# Altium PCB TeamC&K_PCB.PcbDoc (part 1 of 2)
Units mil, origin at the board's own origin, x right, y up, seen from the top; angles counter-clockwise.
Board outline 3149.61 x 2362.21 mil, 4 copper layers (Top Layer, GND, VCC, Bottom Layer), stack 30.835 mil thick; 107 components, 60 nets, 325 pads, 86 vias.
Unrouted connection lines stored in the file: 14.
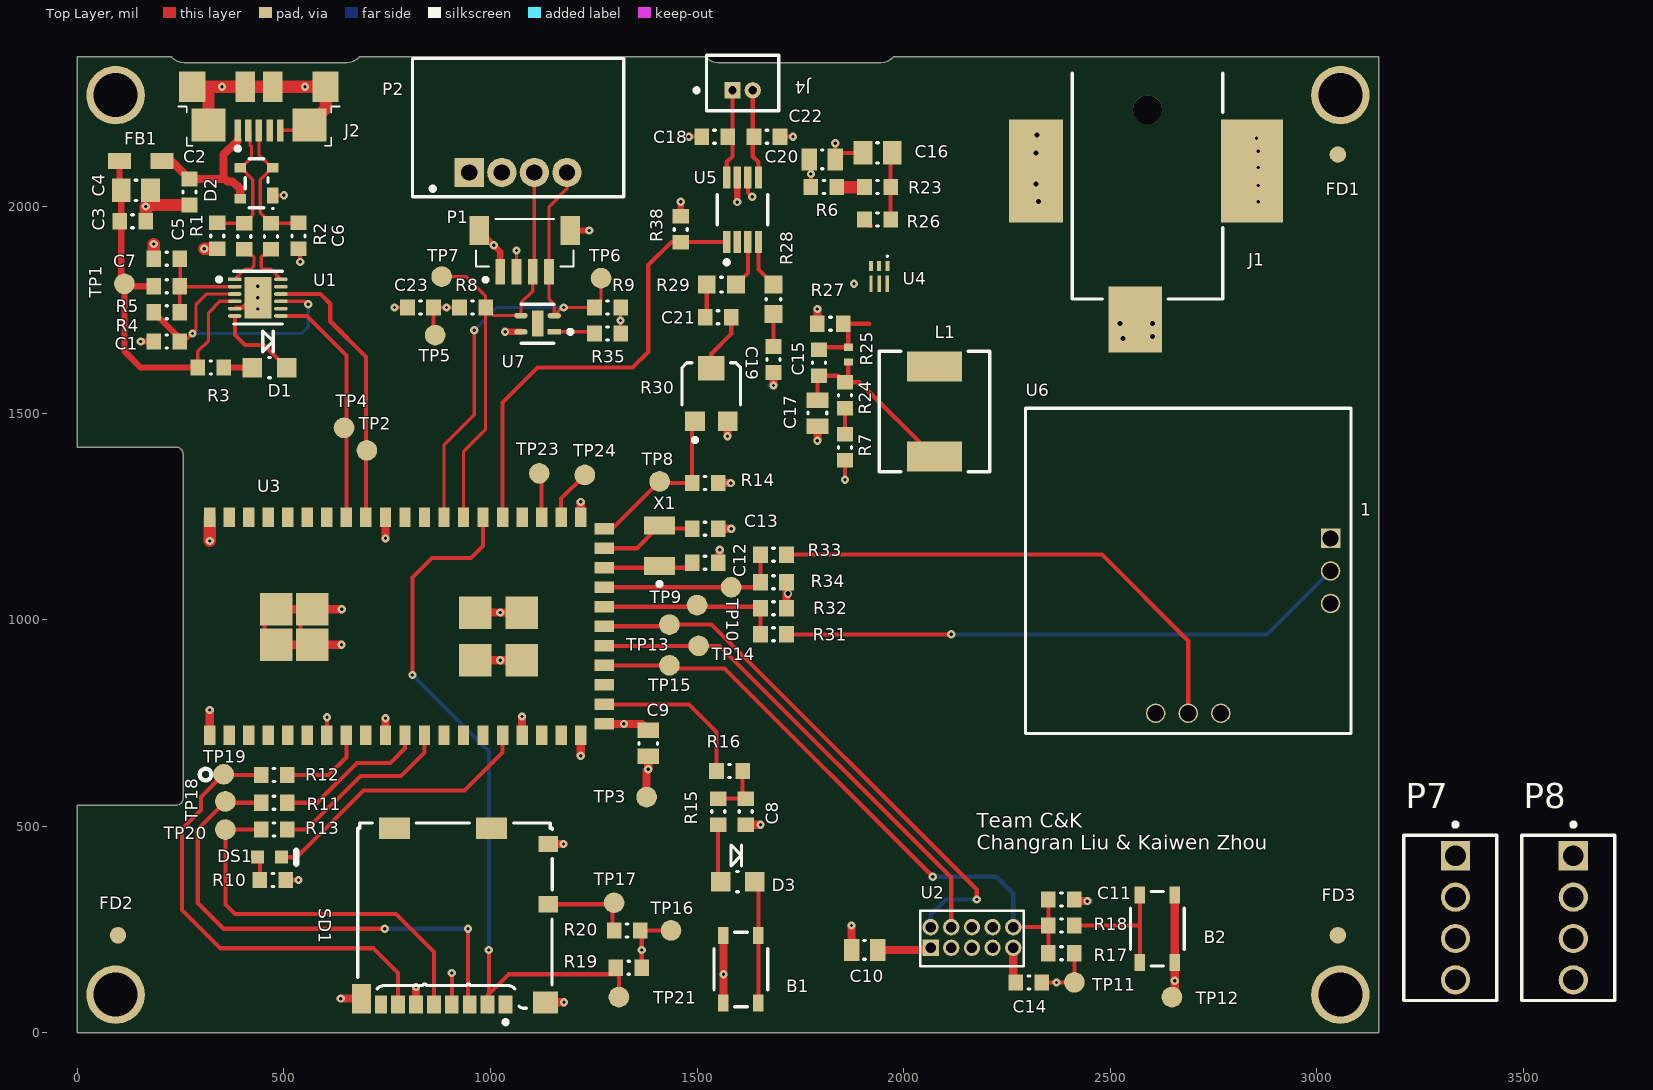
[diagram p0: Top Layer view]
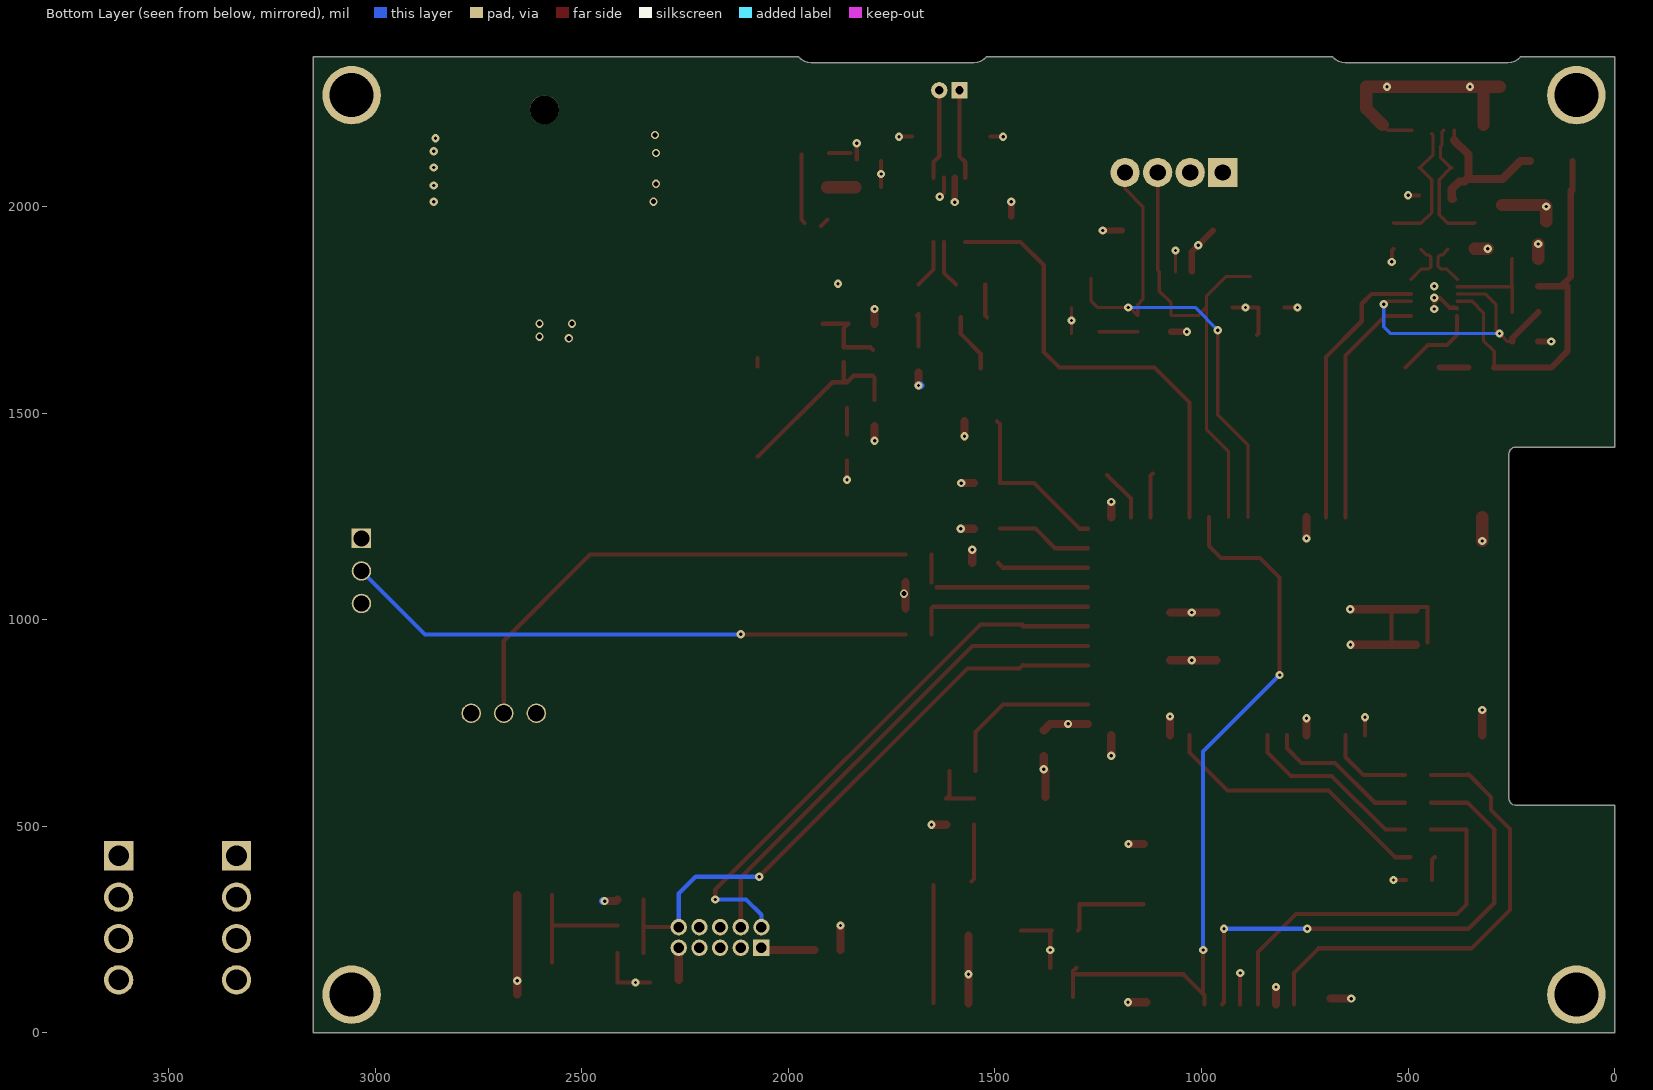
[diagram p1: Bottom Layer view, seen from below]
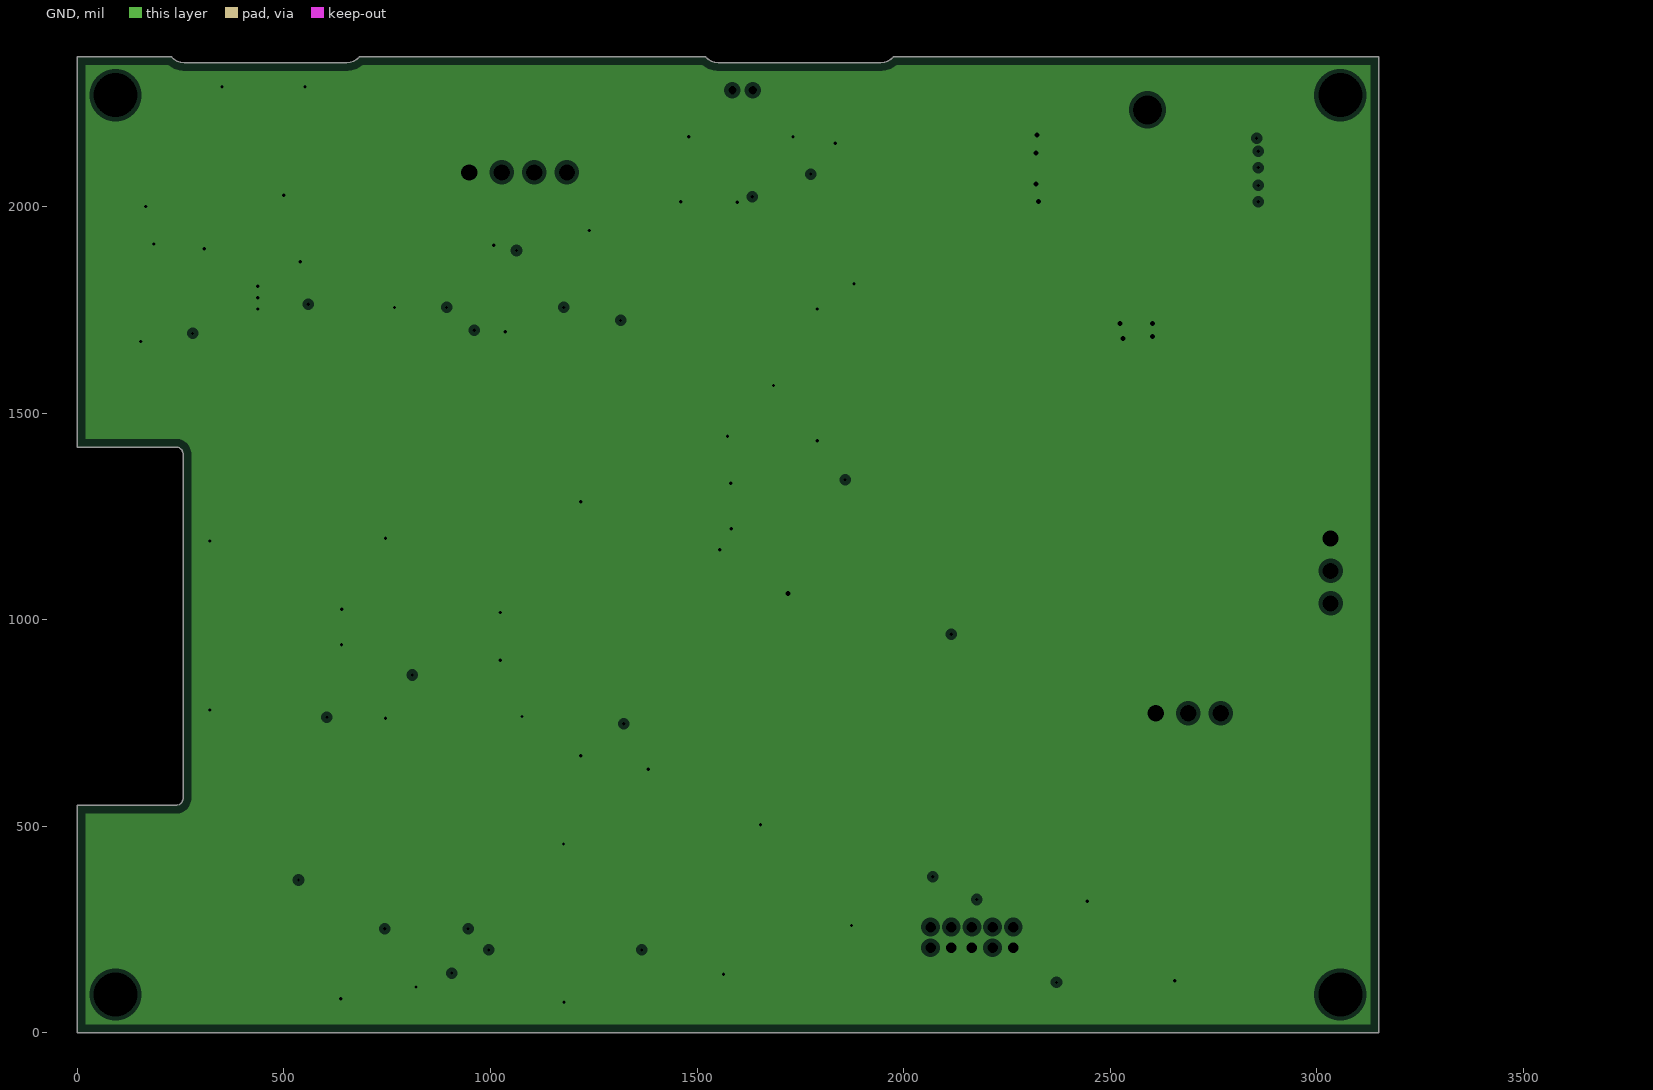
[diagram p2: GND, clearances drawn from the general rule]
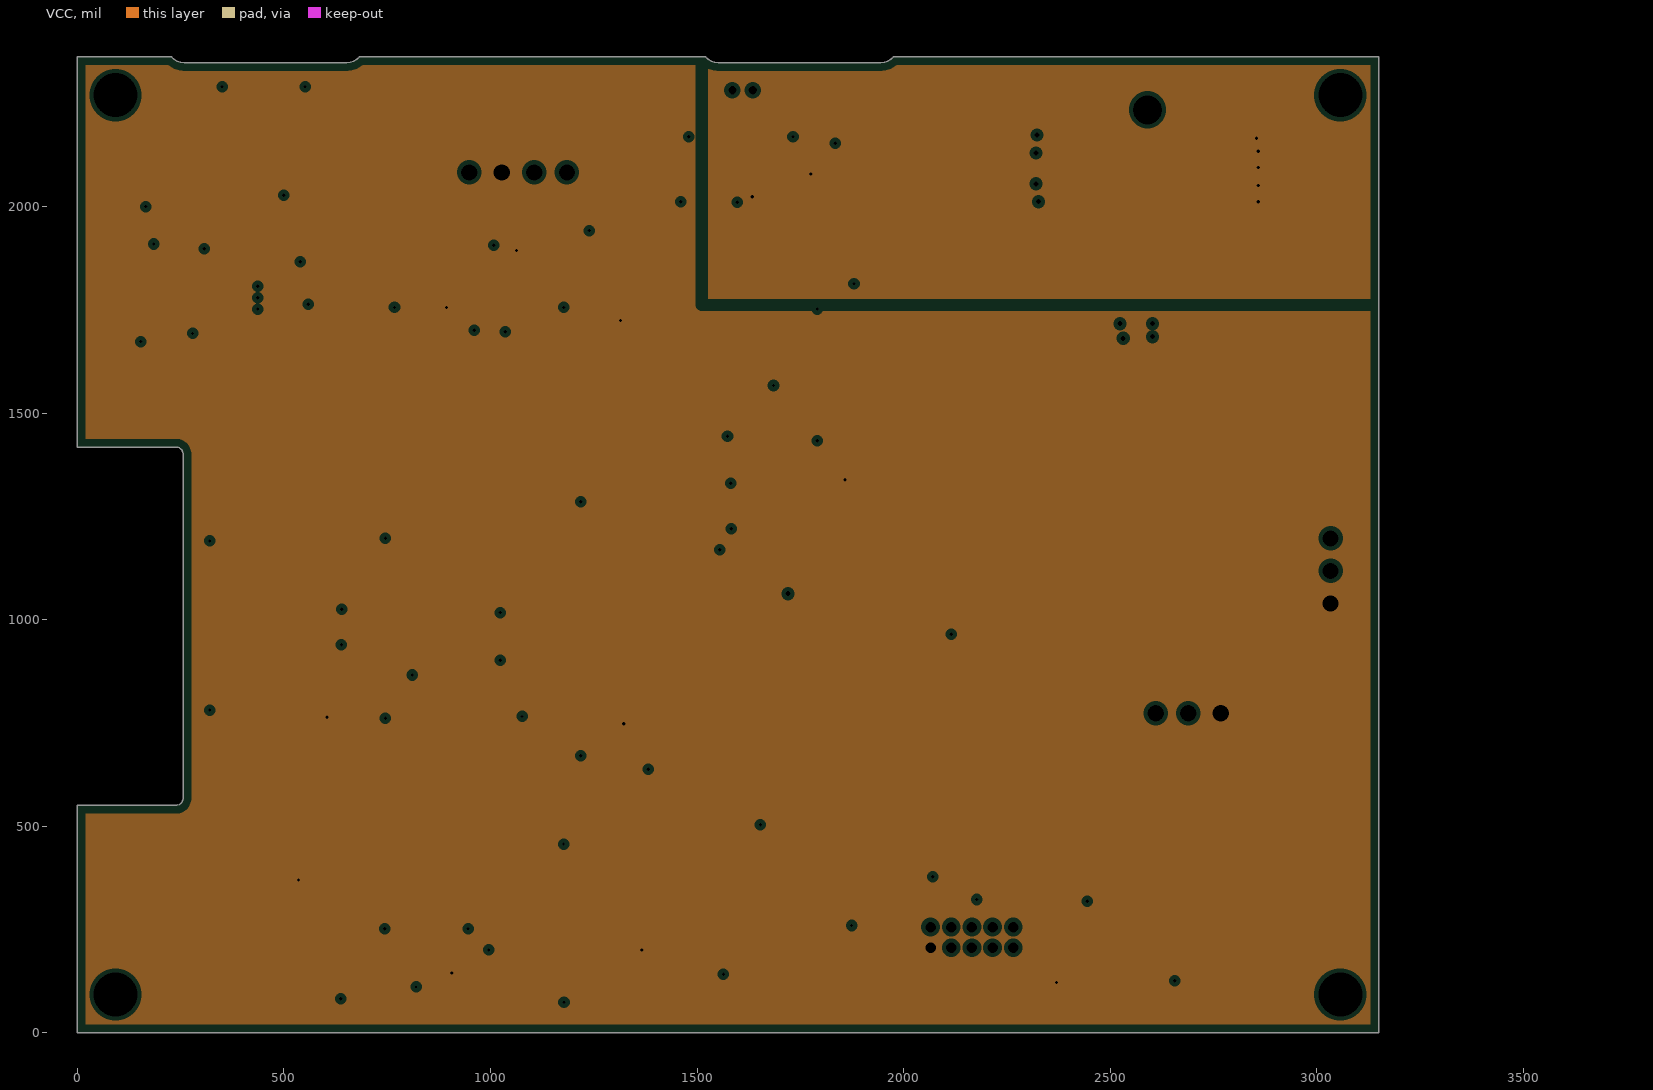
[diagram p3: VCC, clearances drawn from the general rule]

## Layer stack, top to bottom
Top Solder: solder mask 1, Solder Resist, Dk 3.5
Top Layer: signal copper 1.5
Dielectric1: core 10, PP-006, Dk 4.2
GND: plane copper 1.4173, net GND
Dielectric 3: prepreg 5, Dk 4.2
VCC: plane copper 1.4173, net (Multiple Nets)
Dielectric 2: core 10, Dk 4.2
Bottom Layer: signal copper 1.5
Bottom Solder: solder mask 1, Solder Resist, Dk 3.5

## Board outline
240.16,551.18 0,551.18 0,0 3149.61,0 3149.61,2362.21 1975.39,2362.2 1969.06,2356.37 1961.63,2352.01 1953.45,2349.32 1944.88,2348.42 1551.18,2348.42 1542.62,2349.33 1534.45,2352.01 1527.02,2356.35 1520.67,2362.16 682.72,2362.2 676.38,2356.37 668.95,2352.01 660.77,2349.32 652.2,2348.42 258.5,2348.42 249.95,2349.33 241.77,2352.01 234.34,2356.35 227.99,2362.16 0,2362.2 0,1417.32 240.16,1417.32 243.66,1416.93 246.99,1415.77 249.98,1413.89 252.48,1411.4 254.35,1408.41 255.51,1405.08 255.91,1401.57 255.91,566.93 255.51,563.42 254.35,560.09 252.48,557.1 249.98,554.61 246.99,552.73 243.66,551.57

## Design rules (kind name [scope] priority, off if disabled: settings)
AcuteAngle [All] p1 off: minimum=6.00000000000000E+0001 checktracksonly=TRUE
AssemblyTestPointUsage [All] p1 off: allowmultiple=TRUE
AssemblyTestpoint [All] p1 off: testpointundercomponent=TRUE minsize=30 maxsize=100 preferedsize=60 minholesize=0 maxholesize=40 preferedholesize=32 testpointgrid=1 usegrid=FALSE gridtolerance=0.01 allowsidebottom=TRUE
Clearance [All] p1: gap=6 ignorepadtopadclearanceinfootprint=FALSE except(0: Arc-Hole Track-Hole SMDPad-Hole THPad-Hole Via-Hole Fill-Hole Poly-Hole Region-Hole Text-Hole)
ComponentClearance [All] p1: gap=0 collisioncheckmode=3 verticalgap=0 showdistances=FALSE
DiffPairsRouting [All] p1: maxlimit=10 minlimit=6 mostfreqgap=10 toplayer_minwidth=6 toplayer_maxwidth=25 toplayer_prefwidth=15 bottomlayer_minwidth=6 bottomlayer_maxwidth=25 bottomlayer_prefwidth=15 maxuncoupledlength=500
FabricationTestPointUsage [All] p1 off: valid=0 allowmultiple=TRUE
FabricationTestpoint [All] p1 off: side=2 testpointundercomponent=TRUE minsize=30 maxsize=100 preferedsize=60 minholesize=0 maxholesize=40 preferedholesize=32 testpointgrid=1 allowsidebottom=TRUE usegrid=FALSE gridtolerance=0.01
HoleSize [All] p1: absolutevalues=TRUE maxlimit=150 minlimit=8 maxpercent=80.000 minpercent=20.000
HoleToHoleClearance [All] p1: gap=0 allowstackedmicrovias=TRUE
MinimumAnnularRing [All] p1 off: minimumring=6
MinimumSolderMaskSliver [All] p1: minsoldermaskwidth=0
PlaneClearance [All] p1: clearance=10
PlaneConnect [All] p1: planeconnectstyle=Relief reliefexpansion=20 reliefentries=4 reliefconductorwidth=10 reliefairgap=10
PolygonConnect [All] p1: connectstyle=Relief reliefconductorwidth=10 reliefentries=4 polygonreliefangle="45 Angle" airgapwidth=10
RoomDefinition U_3.3VBuck [InComponentClass('U_3.3VBuck')] p1: confinementstyle=ConfineIn formatcopy=TRUE lockcomponents=FALSE outline -680,-4820 1320,-4820 1320,-3820 -680,-3820
RoutingVias [All] p1: holewidth=8 width=20 viastyle="Through Hole" minholewidth=8 minwidth=20 maxholewidth=30 maxwidth=50
SMDNeckDown [All] p1 off: percent=90.000
SMDToCorner [All] p1 off: distance=0
SMDToPlane [All] p1 off: distance=0
SilkToSilkClearance [All] p1: silktosilkclearance=0
SilkToSolderMaskClearance [IsPad] p1: minsilkscreentomaskgap=0 clearancetoexposedcopper=TRUE
SolderMaskExpansion [All] p1: expansion=2 istentingtop=FALSE
ViasUnderSMD [All] p1: allowed=FALSE
Width [All] p1: maxlimit=1000 minlimit=6 preferedwidth=10
17 further rules are at their usual default settings.

## Classes and differential pairs
component class U_Thumbstick: R31 R32 R33 R34 U6
component class Designator: C23 R35 U7
component class U_Memory: C14 R19 R20 SD1 TP16 TP17 TP18 TP19 TP20 TP21
component class U_MCU: B1 B2 C8 C9 C10 C11 C12 C13 D3 R15 R16 R17 R18 TP11 TP12 TP13 TP14 TP15 TP23 TP24 U2 U3 X1
component class U_3.3VBuck: C15 C16 C17 L1 R23 R24 R25 R26 R27 U4
component class U_FTDI: C1 C2 C3 C4 C5 C6 C7 D1 D2 FB1 R1 R2 R3 R4 R5 U1
component class U_Audio: C18 C19 C20 C21 C22 J4 R28 R29 R30 U5
component class MAIN: DS1 FD1 FD2 FD3 J1 J2 P1 P2 P7 P8 R6 R7 R8 R9 R10 R11 R12 R13 R14 R38 TP1 TP2 TP3 TP4 TP5 TP6 TP7 TP8 TP9 TP10
differential pair USB_FTDI_DATA_4: +USB_FTDI_DATA_4_P -USB_FTDI_DATA_4_N
differential pair USB_DATA: +USB_DATA_P -USB_DATA_N

## Components (designator, comment, footprint, x,y, rotation, side; value= is the part's Value field where it differs from the comment)
B1 "PTS810 SJK 250 SMTR LFS" "PTS810 SJK 250 SMTR LFS" 1606.3,153.54 r270 top
B2 "PTS810 SJK 250 SMTR LFS" "PTS810 SJK 250 SMTR LFS" 2614.17,251.97 r90 top
C1 "100nF 16V" CAPC0603(1608)100_N 216.54,1673.23 r0 top value=100nF
C2 "10nF 16V" CAPC0603(1608)100_N 271.65,2035.43 r90 top value=10nF
C3 "100nF 16V" CAPC0603(1608)100_N 133.86,1964.57 r180 top value=100nF
C4 "4.7uF 16V" CAPC0805(2012)145_N 141.73,2039.37 r180 top value=4.7uF
C5 "47pF 16V" CAPC0603(1608)100_N 338.58,1929.13 r90 top value=47pF
C6 "47pF 16V" CAPC0603(1608)100_N 535.43,1929.13 r90 top value=47pF
C7 "100nF 16V" CAPC0603(1608)100_N 216.54,1874.02 r0 top value=100nF
C8 "1uF 16V" CAPC0603(1608)100_N 1618.11,535.43 r90 top value=1uF
C9 "10uF 16V" CAPC0805(2012)145_L 1381.89,700.79 r90 top value=10uF
C10 "10uF 16V" CAPC0805(2012)145_L 1905.51,200.79 r0 top value=10uF
C11 "1uF 16V" CAPC0603(1608)100_N 2381.89,322.83 r180 top value=1uF
C12 "18pF 16V" CAPC0603(1608)100_N 1519.68,1137.8 r180 top value=18pF
C13 "18pF 16V" CAPC0603(1608)100_N 1519.68,1220.47 r180 top value=18pF
C14 "CAP 100nF 16V 0603(1608)" CAPC0603(1608)100_N 2303.15,122.05 r0 top value=100nF
C15 "120pF 25V" CAPC0603(1608)100_N 1795.28,1622.05 r270 top value=120pF
C16 "4.7uF 16V" CAPC0805(2012)145_N 1937.01,2129.92 r0 top value=4.7uF
C17 "22uF 10V" CAPC0805(2012)100_L 1791.34,1500 r90 top value=22uF
C18 "220pF 10V" CAPC0603(1608)100_N 1542.62,2169.29 r0 top value=220pF
C19 "1uF 16V" CAPC0603(1608)100_N 1685.04,1629.92 r270 top value=1uF
C20 "10uF 16V" CAPC0805(2012)145_L 1803.15,2114.17 r180 top value=10uF
C21 "1uF 16V" CAPC0603(1608)100_N 1551.18,1732.28 r0 top value=1uF
C22 "220pF 10V" CAPC0603(1608)100_N 1669.29,2169.29 r180 top value=220pF
C23 "100nF 16V" CAPC0603(1608)100_N 830.71,1755.91 r0 top value=100nF
D1 "LTST-C170CKT" LTST-C170CKT_V 465.17,1610.24 r0 top
D2 "PRTR5V0U2X,215" NXP-SOT143B-4_V 433.88,2056.53 r180 top
D3 "LTST-C170CKT" LTST-C170CKT_V 1598.43,366.14 r0 top
DS1 "LTST-C191KGKT" LITE-ON-LTST-C191KRKT-2_V 465.17,425.2 r0 top
FB1 "BLM21PG221SN1D" MURA-BLM21-B20-CHIP-2_V2 153.54,2110.59 r180 top
FD1 "40x100mm" Fiducial_FT#1 3033.46,2094.49 r0 top
FD2 "40x100mm" Fiducial_FT#2 98.43,224.41 r0 top
FD3 "40x100mm" Fiducial_FT#3 3033.46,259.84 r0 top
J1 "RASM722PTR13X" FP-RASM722PTR13X-MFG 2590.55,2066.93 r180 top
J2 "ZX62R-B-5P" HIRO-ZX62R-B-5P_V 439.58,2237.34 r180 top
J4 "53047-0210" FP-53047-0210-MFG 1610.24,2299.21 r180 top
L1 "SPM6550T-R47M-HZ" FP-SPM6550-MFG 2074.8,1503.94 r270 top value=470nH
P1 "BM04B-SRSS-TBT(LF)(SN)" CONN_BM04B-SRSS-TBT(LF)(SN) 1082.68,1842.52 r0 top
P2 "B4B-PH-SM4-TB(LF)(SN)" TECO-640456-4#1 1066.93,2082.68 r180 top
P7 "640456-4" TECO-640456-4#2 3335.74,278.41 r90 top
P8 "640456-4" TECO-640456-4#2 3621.17,278.41 r90 top
R1 "27R 1%" RESC0603(1608)_N 404,1928 r270 top value="27.00 Ohm"
R2 "27R 1%" RESC0603(1608)_N 469,1928 r270 top value="27.00 Ohm"
R3 "1K 1%" RESC0603(1608)_N 322.83,1610.24 r180 top value="1000.00 Ohm"
R4 "Jumper" RESC0603(1608)_N 216.54,1744.09 r0 top value="0.00 Ohm"
R5 "1K 1%" RESC0603(1608)_N 216.54,1807.09 r0 top value="1000.00 Ohm"
R6 "Jumper" RESC0603(1608)_N 1807.09,2047.24 r0 top value="0.00 Ohm"
R7 "Jumper" RESC0603(1608)_N 1858.27,1417.32 r270 top value="0.00 Ohm"
R8 "10K 1%" RESC0603(1608)_N 956.69,1755.91 r180 top value="10000.00 Ohm"
R9 "10K 1%" RESC0603(1608)_N 1283.46,1755.91 r0 top value="10000.00 Ohm"
R10 "1K 1%" RESC0603(1608)_N 473.25,370.08 r180 top value="1000.00 Ohm"
R11 "27R 1%" RESC0603(1608)_N 476.38,557.09 r180 top value="27.00 Ohm"
R12 "27R 1%" RESC0603(1608)_N 476.38,624.02 r180 top value="27.00 Ohm"
R13 "27R 1%" RESC0603(1608)_N 476.38,492.13 r180 top value="27.00 Ohm"
R14 "10K 1%" RESC0603(1608)_N 1519.68,1330.71 r180 top value="10000.00 Ohm"
R15 "100R 1%" RESC0603(1608)_N 1551.18,535.43 r90 top value="100.00 Ohm"
R16 "10K 1%" RESC0603(1608)_N 1578.74,633.86 r0 top value="10000.00 Ohm"
R17 "10K 1%" RESC0603(1608)_N 2381.89,192.91 r0 top value="10000.00 Ohm"
R18 "100R 1%" RESC0603(1608)_N 2381.89,259.84 r180 top value="100.00 Ohm"
R19 "10K 1% 0603(1608)" RESC0603(1608)_N 1334.65,157.48 r0 top value="10000.00 Ohm"
R20 "10K 1% 0603(1608)" RESC0603(1608)_N 1330.71,248.03 r0 top value="10000.00 Ohm"
R23 "Jumper" RESC0603(1608)_N 1937.01,2047.24 r0 top value="0.00 Ohm"
R24 "Jumper" RESC0603(1608)_N 1858.27,1543.31 r270 top value="0.00 Ohm"
R25 "453K 1%" RESC0402(1005)_L 1866.14,1641.73 r270 top value="453000.00 Ohm"
R26 "100K 1%" RESC0603(1608)_N 1937.01,1968.5 r180 top value="100000.00 Ohm"
R27 "100K 1%" RESC0603(1608)_N 1822.83,1716.54 r0 top value="100000.00 Ohm"
R28 "100R 1%" RESC0603(1608)_M 1685.04,1775.59 r90 top value="100.00 Ohm"
R29 "100R 1%" RESC0603(1608)_M 1559.06,1811.02 r0 top value="100.00 Ohm"
R30 "TC33X-2-103E" BOUR-TC33X-2_V 1534.45,1551.18 r90 top
R31 "10K 1%" RESC0603(1608)_N 1685.04,964.57 r0 top value="10000.00 Ohm"
R32 "10K 1%" RESC0603(1608)_N 1685.04,1027.56 r180 top value="10000.00 Ohm"
R33 "10K 1%" RESC0603(1608)_N 1685.04,1157.48 r0 top value="10000.00 Ohm"
R34 "10K 1%" RESC0603(1608)_N 1685.04,1090.55 r180 top value="10000.00 Ohm"
R35 "Jumper" RESC0603(1608)_N 1283.46,1692.91 r180 top value="0.00 Ohm"
R38 "10K 1%" RESC0603(1608)_N 1460.63,1944.88 r270 top value="10000.00 Ohm"
SD1 "104031-0811" MOLX-104031-0811_V 913.86,282.2 r0 top locked
TP1 "0.1\" Pad" PCBComponent 114,1812.99 r90 top
TP2 "0.1\" Pad" PCBComponent 700.79,1409.9 r90 top
TP3 "0.1\" Pad" PCBComponent 1377.95,570.87 r90 top
TP4 "0.1\" Pad" PCBComponent 645.67,1464.57 r90 top
TP5 "0.1\" Pad" PCBComponent 866.14,1688.98 r90 top
TP6 "0.1\" Pad" PCBComponent 1267.72,1826.77 r90 top
TP7 "0.1\" Pad" PCBComponent 881.89,1830.71 r90 top
TP8 "0.1\" Pad" PCBComponent 1409.45,1334.65 r90 top
TP9 "0.1\" Pad" PCBComponent 1500,1035.43 r90 top
TP10 "0.1\" Pad" PCBComponent 1582.68,1078.58 r90 top
TP11 "0.1\" Pad" PCBComponent 2413.39,122.26 r90 top
TP12 "0.1\" Pad" PCBComponent 2649.61,86.61 r90 top
TP13 "0.1\" Pad" PCBComponent 1433.07,988.19 r90 top
TP14 "0.1\" Pad" PCBComponent 1503.94,936.85 r90 top
TP15 "0.1\" Pad" PCBComponent 1433.07,889.76 r90 top
TP16 "0.1\" Pad" PCBComponent 1437.01,248.03 r90 top
TP17 "0.1\" Pad" PCBComponent 1299.21,314.96 r90 top
TP18 "0.1\" Pad" PCBComponent 358.27,560.09 r90 top
TP19 "0.1\" Pad" PCBComponent 354.33,625.98 r90 top
TP20 "0.1\" Pad" PCBComponent 358.27,492.13 r90 top
TP21 "0.1\" Pad" PCBComponent 1311.02,86.61 r90 top
TP23 "0.1\" Pad" PCBComponent 1118.11,1354.33 r90 top
TP24 "0.1\" Pad" PCBComponent 1228.35,1350.39 r90 top
U1 "FT234XD-R" FP-DFN-12-IPC_B 437.01,1779.53 r0 top
U2 "20021111-00010T4LF" 20021111-00010T4LF 2165.35,255.91 r0 top
U3 "SAMW25H18-MR510PB" SAMW25H18-MR510PB 797.83,984.25 r180 top locked
U4 "TPS62827DMQR" TPS6282518DMQR 1940.94,1830.71 r270 top
U5 "PAM8302AASCR" FP-MSOP-8-MFG 1610.24,1992.13 r90 top
U6 "2765 Thumbstick" thumbstick 2688.98,1118.11 r0 top
U7 "SHTC3" FP-SHTC3-IPC_A 1114.17,1716.54 r180 top
X1 "ABS07-32.768KHz-T" ABRA-ABS07-2_V 1409.45,1178.92 r90 top

## Footprints (in the part's own frame and the unit in brackets; to place one, negate y for a bottom-side part, rotate by r counter-clockwise, add the part's x,y. Pads: shape width x height; smd on the part's side, far side on the other; paste and mask are expansions set on the pad)
20021111-00010T4LF [mil] "CONN HEADER 10POS UNSHD VERT T/H"
  rect 39.6x39.6 hole 25.6: 1(-100,-50)
  round 39.6 hole 25.6: 2(-100,0) 3(-50,-50) 4(-50,0) 5(0,-50) 6(0,0) 7(50,-50) 8(50,0) 9(100,-50) 10(100,0)
  silkscreen extent -125,-95 125,40, body extent -125,-92 125,42, height 217
ABRA-ABS07-2_V [mm] "Hand Drawn, 2-Leads, Body 3.2x1.5mm, Pitch 2.5mm"
  rect 1.1x1.9 smd: 1(-1.25,0) 2(1.25,0)
  silkscreen extent -2.47,-0.13 -2.23,0.12, body extent -1.6,-0.75 1.6,0.75, height 0.9
BOUR-TC33X-2_V [mm] "SMD, 3-Leads, Body 3.8x3.6mm"
  rect 1.2x1.2 smd: 1(-1.8,1) 3(-1.8,-1)
  rect 1.5x1.6 smd: 2(1.45,0)
  silkscreen extent -3.07,-1.8 1.8,1.8, body extent -2,-1.8 1.96,1.8, height 1.15
CAPC0603(1608)100_N [mm] "Chip Capacitor, Body 1.6x0.8mm, Height 1.0mm, IPC Medium Density"
  rect 0.9x1 smd: 1(-0.8,0) 2(0.8,0)
  silkscreen extent -0.05,-0.4 0.05,0.4, body extent -0.87,-0.48 0.88,0.47, height 1
CAPC0805(2012)100_L [mm] "Chip Capacitor, Body 2.0x1.2mm, Height 1.0mm, IPC High Density"
  rect 0.95x1.35 smd: 1(-0.8,0) 2(0.8,0)
  silkscreen extent -0.05,-0.58 0.05,0.58, body extent -1.1,-0.72 1.1,0.72, height 1
CAPC0805(2012)145_L [mm] "Chip Capacitor, Body 2.0x1.2mm, Height 1.45mm, IPC High Density"
  rect 0.95x1.35 smd: 1(-0.8,0) 2(0.8,0)
  silkscreen extent -0.05,-0.58 0.05,0.58, body extent -1.1,-0.72 1.1,0.72, height 1.45
CAPC0805(2012)145_N [mm] "Chip Capacitor, Body 2.0x1.2mm, Height 1.45mm, IPC Medium Density"
  rect 1.15x1.45 smd: 1(-0.9,0) 2(0.9,0)
  silkscreen extent -0.05,-0.62 0.05,0.63, body extent -1.1,-0.72 1.1,0.73, height 1.45
CONN_BM04B-SRSS-TBT(LF)(SN) [mm]
  rect 0.6x1.55 smd: 1(-1.5,0) 2(-0.5,0) 3(0.5,0) 4(1.5,0)
  rect 1.2x1.8 smd: SH1(-2.8,2.525) SH2(2.8,2.525)
  silkscreen extent -3,-0.62 3,3.22, body extent -3,-0.37 3,3.23, height 4.36
Fiducial_FT#1 [mil]
  round 40 smd paste-30 mask+30: ""(17.72,31.5)
Fiducial_FT#2 [mil]
  round 40 smd paste-30 mask+30: ""(0,11.81)
Fiducial_FT#3 [mil]
  round 40 smd paste-30 mask+30: ""(17.72,-23.62)
FP-53047-0210-MFG [mm]
  rect 1x1 hole 0.5 paste-1000 mask+0: 1(0.625,0.45)
  round 1 hole 0.5 paste-1000 mask+0: 2(-0.625,0.45)
  silkscreen extent -2.22,-1.7 2.95,1.7, body extent -2.32,-1.8 2.32,1.8, height 0.25
FP-DFN-12-IPC_B [mm]
  rect 0.84x0.222 smd paste+0 mask+0: 1(-1.416,1.125)
  rrect100% 0.84x0.222 smd paste+0 mask+0: 2(-1.416,0.675) 3(-1.416,0.225) 4(-1.416,-0.225) 5(-1.416,-0.675) 6(-1.416,-1.125) 7(1.416,-1.125) 8(1.416,-0.675) 9(1.416,-0.225) 10(1.416,0.225) 11(1.416,0.675) 12(1.416,1.125)
  rect 1.65x2.55 smd paste-1000 mask+0: 13(0,0)
  silkscreen extent -2.51,-1.63 1.5,1.63
FP-MSOP-8-MFG [mm]
  rect 1.35x0.45 smd paste+0 mask+0: 1(-1.975,0.975) 2(-1.975,0.325) 3(-1.975,-0.325) 4(-1.975,-0.975) 5(1.975,-0.975) 6(1.975,-0.325) 7(1.975,0.325) 8(1.975,0.975)
  silkscreen extent -3.35,-1.55 0.92,1.55, body extent -2.75,-1.65 2.75,1.65, height 0.25
FP-RASM722PTR13X-MFG [mm]
  rect 3.3x4.06 smd paste+0 mask+0: 1(0.76,8.65)
  rect 3.81x6.35 smd paste+0 mask+0: 2(-6.43,-0.49)
  rect 3.3x6.35 smd paste+0 mask+0: 3(6.86,-0.49)
  round 1.78 hole 1.78 unplated paste-1000 mask+0: ""(0,-4.25)
  silkscreen extent -4.63,-6.5 4.63,7.38, body extent -8.43,-7.48 8.61,10.78, height 0.25
FP-SHTC3-IPC_A [mm]
  rect 0.821x0.341 smd paste+0 mask+0: 1(-1.025,0.5)
  rrect100% 0.821x0.341 smd paste+0 mask+0: 2(-1.025,-0.5) 3(1.025,-0.5) 4(1.025,0.5)
  rect 0.7x1.6 smd paste-1000 mask+0: 5(0,0)
  silkscreen extent -2.14,-1.2 1,1.2, body extent -1.94,-1.5 1.94,1.5, height 0.25
FP-SPM6550-MFG [mm]
  rect 1.85x3.4 smd paste+0 mask+0: 1(-2.775,0) 2(2.775,0)
  silkscreen extent -3.7,-3.4 3.7,3.4, body extent -3.8,-3.5 3.8,3.5, height 0.25
HIRO-ZX62R-B-5P_V [mm] "USB Micro-B R/A Connector"
  rect 0.4x1.35 smd: 1(1.3,1.338) 2(0.65,1.338) 3(0,1.338) 4(-0.65,1.338) 5(-1.3,1.338)
  rect 2.1x2 smd: 6(-3.1,1.012) 11(3.1,1.012)
  rect 1.6x1.9 smd: 7(-4.1,-1.338) 10(4.1,-1.338)
  rect 1.2x1.9 smd: 8(-0.85,-1.338) 9(0.85,-1.338)
  silkscreen extent -4.95,-0.13 4.95,2.58, body extent -4.4,-3.95 4.4,1.78, height 2.71
LITE-ON-LTST-C191KRKT-2_V [mm] "Chip, 2-Leads, Body 1.6x0.8mm"
  rect 0.8x0.8 smd: 1(-0.75,0) 2(0.75,0)
  silkscreen extent 1.65,-0.4 1.65,0.4, body extent -0.8,-0.4 0.8,0.4, height 0.55
LTST-C170CKT_V [mm] "SMD, 2-Leads, Body 2x1.25mm"
  rect 1.2x1.2 smd: 1(-1.05,0) 2(1.05,0)
  silkscreen extent -0.41,-0.63 0.23,2.25, body extent -1,-0.63 1,0.63, height 1.1
MOLX-104031-0811_V [mm] "Micro SD, 8-Leads, Body 11.95x11.4mm, Pitch 1.1mm"
  rect 0.85x1.1 smd: 1(3.113,-5.412) 2(2.013,-5.412) 3(0.913,-5.412) 4(-0.188,-5.412) 5(-1.288,-5.412) 6(-2.387,-5.412) 7(-3.487,-5.412)
  rect 0.75x1.1 smd: 8(-4.537,-5.412)
  rect 1.2x1 smd: 9(5.748,0.738) 10(5.748,4.438)
  rect 1.55x1.35 smd: 11(5.573,-5.287)
  rect 1.17x1.8 smd: 12(-5.747,-5.062)
  rect 1.9x1.35 smd: 13(-3.722,5.413) 14(2.248,5.413)
  silkscreen extent -5.97,-6.64 5.98,5.74, body extent -5.97,-5.66 5.98,5.74, height 1.45
MURA-BLM21-B20-CHIP-2_V2 [mm] "Chip Ferrite Bead, 2-Leads, Body 2x1.25mm, Height 1.05mm, 35/70um Land Pad Thickness, 2A Rated Current"
  rect 1.4x1 smd: 1(-1.3,0) 2(1.3,0)
  body extent -1,-0.63 1,0.63, height 1.05
NXP-SOT143B-4_V [mm] "SOT143, 4-Leads, Body 3x1.4mm"
  rect 0.7x1 smd: 1(-1,0.75)
  rect 0.7x0.6 smd: 2(-1,-0.95) 3(1,-0.95) 4(1,0.95)
  silkscreen extent -1.05,-1.5 0.7,1.6, body extent -0.7,-1.5 0.7,1.5, height 1.1
PCBComponent [mil]
  round 50 smd mask+0: 1(0,0)
  body extent -25,-25 25,25, height 0
"PTS810 SJK 250 SMTR LFS" [mm] "SWITCH TACTILE SPST-NO 0.05A 16V"
  rect 1.05x0.65 smd: 1(-2.075,1.075) 2(2.075,1.075) 3(-2.075,-1.075) 4(2.075,-1.075)
  silkscreen extent -2.29,-1.65 2.29,1.65, body extent -2.3,-1.6 2.3,1.6, height 2.5
RESC0402(1005)_L [mm] "Chip Resistor, Body 1.0x0.5mm, IPC High Density"
  rect 0.45x0.55 smd: 1(-0.45,0) 2(0.45,0)
  body extent -0.52,-0.27 0.53,0.28, height 0.4
RESC0603(1608)_M [mm] "Chip Resistor, Body 1.6x0.8mm, IPC Low Density"
  rect 1.1x1.1 smd: 1(-0.9,0) 2(0.9,0)
  silkscreen extent -0.05,-0.45 0.05,0.45, body extent -0.85,-0.47 0.85,0.47, height 0.6
RESC0603(1608)_N [mm] "Chip Resistor, Body 1.6x0.8mm, IPC Medium Density"
  rect 0.9x1 smd: 1(-0.8,0) 2(0.8,0)
  silkscreen extent -0.05,-0.4 0.05,0.4, body extent -0.85,-0.47 0.85,0.47, height 0.6
SAMW25H18-MR510PB [mm] "RF TXRX MODULE WIFI TRACE ANT"
  rect 2x2 smd: 0(-7.065,-0.839) 0(-7.065,2.085) 0(-4.21,-0.839) 0(-4.21,2.085)
  rect 2x2 smd mask+0.127: 0(5.828,-1.045) 0(5.828,1.137) 0(8.046,-1.045) 0(8.046,1.137)
  rect 0.7x1.2 smd: 1(12.121,6.7) 2(10.921,6.7) 3(9.721,6.7) 4(8.521,6.7) 5(7.321,6.7) 6(6.121,6.7) 7(4.921,6.7) 8(3.721,6.7) 9(2.521,6.7) 10(1.321,6.7) 11(0.121,6.7) 12(-1.079,6.7) 13(-2.279,6.7) 14(-3.479,6.7) 15(-4.679,6.7) 16(-5.879,6.7) 17(-7.079,6.7) 18(-8.279,6.7) 19(-9.479,6.7) 20(-10.679,6.7) 32(-10.679,-6.7) 33(-9.479,-6.7) 34(-8.279,-6.7) 35(-7.079,-6.7) 36(-5.879,-6.7) 37(-4.679,-6.7) 38(-3.479,-6.7) 39(-2.279,-6.7) 40(-1.079,-6.7) 41(0.121,-6.7) 42(1.321,-6.7) 43(2.521,-6.7) 44(3.721,-6.7) 45(4.921,-6.7) 46(6.121,-6.7) 47(7.321,-6.7) 48(8.521,-6.7) 49(9.721,-6.7) 50(10.921,-6.7) 51(12.121,-6.7)
  rect 1.2x0.7 smd: 21(-12.12,6.004) 22(-12.12,4.804) 23(-12.12,3.604) 24(-12.12,2.404) 25(-12.12,1.204) 26(-12.12,0.004) 27(-12.12,-1.196) 28(-12.12,-2.396) 29(-12.12,-3.596) 30(-12.12,-4.796) 31(-12.12,-5.996)
  silkscreen extent 12.02,8.76 12.74,9.48, body extent -12.89,-7.45 20.98,7.46, height 3.37
TECO-640456-4#1 [mm] "Through Hole, 4-Leads, Body 10.16x5.72mm, Pitch 2.54mm"
  rect 1.8x1.8 hole 1 paste+0 mask+0.08: 1(3,0)
  round 1.8 hole 1 paste+0 mask+0.08: 2(1,0) 3(-1,0) 4(-3,0)
  silkscreen extent -6.5,-7 6.5,1.5, body extent -5.97,-6.35 5.97,0.25, height 5.01
TECO-640456-4#2 [mm] "Through Hole, 4-Leads, Body 10.16x5.72mm, Pitch 2.54mm"
  rect 1.8x1.8 hole 1.27 paste+0: 1(3.81,0)
  round 1.8 hole 1.27 paste+0: 2(1.27,0) 3(-1.27,0) 4(-3.81,0)
  silkscreen extent -5.08,-2.54 5.86,3.18, body extent -5.08,-2.54 5.08,3.18, height 10.03
thumbstick [mm]
  rect 1.2x1.2 hole 1: 1(8.75,2)
  round 1.2 hole 1: 2(8.75,0) 3(8.75,-2) 4(-2,-8.75) 5(0,-8.75) 6(2,-8.75)
  silkscreen extent -10,-10 10,10, body extent -8.85,-8.97 8.85,8.98, height 12
TPS6282518DMQR [mm]
  rect 0.6x0.25 smd: 1(-0.65,0.5) 2(-0.65,0) 3(-0.65,-0.5)
  rect 1x0.2 smd: 4(0.45,-0.5) 5(0.45,0) 6(0.45,0.5)
  silkscreen extent -1.3,0.45 -1.2,0.55, body extent -0.75,-0.75 0.75,0.75, height 1.1

## Part data
B1 B2: "SWITCH TACTILE SPST-NO 0.05A 16V Tactile Switch SPST-NO Top Actuated Surface Mount", Color=White, Current Rating="50 mA", Manufacturer="ITT /  C&K Components", Manufacturer Part Number=PTS810SJK250SMTRLFS, Operating Force="2.6 N", Operating Temperature Range="- 40 C to + 85 C", Supplier Part Number 1=CKN10503CT-ND, Voltage Rating DC="16 VDC", Actuator=Oval, Brand="C&K Components", ComponentLink1Description=https://datasheet.ciiva.com/18514/pts810-4mar13-18514061.pdf, ComponentLink1URL=https://datasheet.ciiva.com/18514/pts810-4mar13-18514061.pdf, ComponentLink2Description=https://datasheet.ciiva.com/18514/pts810-4mar13-18514062.pdf, ComponentLink2URL=https://datasheet.ciiva.com/18514/pts810-4mar13-18514062.pdf, ComponentLink3Description=https://datasheet.ciiva.com/18514/pts810-4mar13-18514063.pdf, ComponentLink3URL=https://datasheet.ciiva.com/18514/pts810-4mar13-18514063.pdf, Contact Form=SPST, Contact Plating=Silver, Factory Pack Quantity=2900, Mounting Direction=Straight, Mounting Style=SMD/SMT, Packaging=Reel, Part # Aliases=Y97LT25B5DBFP, Product Category="Tactile Switches", RoHS=Details, Series=PTS810, Stem Height="2.5 mm", Supplier 1=Digi-Key, Switch Function="OFF - (ON)", Termination Style="J Form Lead", Travel="0.15 mm"
C1 C3 C7 C14 C23: library part CMP-1035-02584-1, "CAP 100nF 16V ±10% 0603 (1608 Metric) Thickness 1mm SMD", Case-EIA=0603, Case-Metric=1608, Rated Voltage="16 V", Tolerance=Â±10%, Max Thickness="1 mm", Technology=SMT
C2: library part CMP-1035-02311-1, "CAP 10nF 16V ±10% 0603 (1608 Metric) Thickness 1mm SMD", Case-EIA=0603, Case-Metric=1608, Rated Voltage="16 V", Tolerance=Â±10%, Max Thickness="1 mm", Technology=SMT
C4 C16: library part CMP-1036-04893-1, "CAP 4.7uF 16V -20% to +80% 0805 (2012 Metric) Thickness 1.45mm SMD", Case-EIA=0805, Case-Metric=2012, Rated Voltage="16 V", Tolerance="-20% to +80%", Max Thickness="1.45 mm", Technology=SMT
C5 C6: library part CMP-1035-01048-1, "CAP 47pF 16V ±0.5pF 0603 (1608 Metric) Thickness 1mm SMD", Case-EIA=0603, Case-Metric=1608, Rated Voltage="16 V", Tolerance=Â±0.5pF, Max Thickness="1 mm", Technology=SMT
C8 C11 C19 C21: library part CMP-1035-02736-1, "CAP 1uF 16V ±5% 0603 (1608 Metric) Thickness 1mm SMD", Case-EIA=0603, Case-Metric=1608, Rated Voltage="16 V", Tolerance=Â±5%, Max Thickness="1 mm", Technology=SMT
C9 C10 C20: library part CMP-1036-04927-1, "CAP 10uF 16V ±10% 0805 (2012 Metric) Thickness 1.45mm SMD", Case-EIA=0805, Case-Metric=2012, Rated Voltage="16 V", Tolerance=Â±10%, Max Thickness="1.45 mm", Technology=SMT
C12 C13: library part CMP-1035-00738-1, "CAP 18pF 16V ±5% 0603 (1608 Metric) Thickness 1mm SMD", Case-EIA=0603, Case-Metric=1608, Rated Voltage="16 V", Tolerance=Â±5%, Max Thickness="1 mm", Technology=SMT
C15: library part CMP-1035-01312-1, "CAP 120pF 25V ±1% 0603 (1608 Metric) Thickness 1mm SMD", Case-EIA=0603, Case-Metric=1608, Rated Voltage="25 V", Tolerance=Â±1%, Max Thickness="1 mm", Technology=SMT
C17: library part CMP-1036-04944-1, "CAP 22uF 10V ±20% 0805 (2012 Metric) Thickness 1mm SMD", Case-EIA=0805, Case-Metric=2012, Rated Voltage="10 V", Tolerance=Â±20%, Max Thickness="1 mm", Technology=SMT
C18 C22: library part CMP-1035-01455-1, "CAP 220pF 10V ±2% 0603 (1608 Metric) Thickness 1mm SMD", Case-EIA=0603, Case-Metric=1608, Rated Voltage="10 V", Tolerance=Â±2%, Max Thickness="1 mm", Technology=SMT
D1 D3: library part CMP-1674-00001-5, "LED Uni-Color Red, 100 mW, 200 mA, -55 to 85 degC, 2-Pin SMD, RoHS, Tape and Reel", Colour=Red, Manufacturer=Lite-On, Max Operating Temperature="85 degC", Min Operating Temperature="-55 degC", Package Quantity=3000, ComponentLink1Description="Manufacturer URL", ComponentLink1URL=http://www.us.liteon.com/, ComponentLink2Description=Datasheet, ComponentLink2URL=http://media.digikey.com/pdf/Data%20Sheets/Lite-On%20PDFs/LTST-C170CKT.pdf, DatasheetVersion=03/2003, Height="1.1 mm", Length="2 mm", Mount="Surface Mount", Mounting Technology="Surface Mount", PackageDescription="2-Pin Surface Mount Device, Body 2 x 1.25 mm", PackageReference=C170CKT, Packaging="Tape and Reel", Pins=2, RoHSCompliant=true
D2: library part CMP-2000-05285-1, "Ultra Low Capacitance Double Rail-to-Rail ESD Protection Diode, 5.5 V, 1 pF, -40 to 85 degC, 4-Pin SOT143B, RoHS, Tape and Reel", Capacitance Value=16pF, ESD Protection Voltage=8KV@ContactDisc, Leakage Current=0.1uA, Manufacturer="NXP Semiconductors", Operating Temp Range=-40Cto85C, Operating Temperature Classification=Industrial, Operating Temperature Max Deg. C=85C, Operating Temperature Min Deg. C=-40C, Package / Case=SOT, Reverse Breakdown Voltage=6V, Reverse Stand-off Voltage=5.5V, Configuration=Quad, Datasheet URL=https://datasheet.ciiva.com/4479/prtr5v0u2x-102853-4479461.pdf, Datasheet Version="Rev. 02, 01/2008", Direction Type=Uni-Directional, Leakage Current (Max)=0.1uA, Manufacturer URL=http://www.nxp.com/, Mounting=SurfaceMount, Mounting Style=SurfaceMount, Number of Elements=1, Package Type=SOT, Packaging=TapeandReel, Pin Count=3+Tab, Polarity=Uni-Directional, Product Depth (mm)=1.4mm, Product Height (mm)=1mm, Product Length (mm)=3mm, Rad Hardened=No, Suppressor Type=DiodeArrays, Working Voltage=5.5V, Working Voltage (Max)=5.5V
DS1: library part CMP-2000-05198-1, "Chip LED, Green, 574 nm, 40 pF, -55 to 85 degC, 2-Pin SMD, RoHS, Tape and Reel", Emitting Color=YellowGreen, Forward Current=30mA, Forward Voltage=2.4V, Manufacturer=Lite-On, Operating Temp Range=-55Cto85C, Operating Temperature Classification=Industrial, Package Type=ChipLed, Power Dissipation=75W, Reverse Voltage=5V, Test Current (It)=20mA, Chip Material=AlGaInP, Datasheet URL=http://download.siliconexpert.com/pdfs/2007/08/26/semi_b/manual/lot/ds/ltst-c191kgkt.pdf, Datasheet Version=Jan-07, DELETED=Compliant, Dominant Wave Length=571nm, High Brightness=Yes, Lens Dimensions=1.1X0.8X0.37mm, Lum Intensity=35mcd, Luminous Intensity=35mcd, Main Category=ChipLED, Manufacturer URL=http://www.us.liteon.com/, Mounting=SurfaceMount, Number of Elements=1, Packaging=TapeandReel, Peak Wavelength=574nm, Pin Count=2, Product Depth (mm)=0.8mm, Product Height (mm)=0.55mm, Product Length (mm)=1.6mm, Rad Hardened=No, Shape Type=Rectangular, Type=Uni-Color, Viewing Angle=130deg
FB1: library part CMP-0686-00610-2, "Chip Ferrite Bead for Power Lines, 220 Ohm, 2000 mA, -55 to 125 degC, 2 x 1.25 x 1.05 mm SMD, Tape and Reel", DC Resistance="0.045 Ohm Max.", Manufacturer=Murata, Operating Temperature Range="-55 to 125 degC", Rated Current="2000 mA", ComponentLink1Description="Manufacturer URL", ComponentLink1URL=http://www.murata.com/, ComponentLink2Description=Datasheet, ComponentLink2URL=http://www.murata.com/products/catalog/pdf/c31e.pdf, ComponentLink3Description="Package Specification", ComponentLink3URL=http://www.murata.com/products/catalog/pdf/c31e.pdf, DatasheetVersion=08/2013, Impedance (at 100 MHz)="220 Ohm +/- 25%", Mounting Technology="Surface Mount", PackageDescription="2-Pin Chip, Body 2 x 1.25 mm", PackageReference=BLM21_H1050-2, Packing="Tape and Reel", PartNumber=BLM21PG221SN1D
FD1 FD2 FD3: library part CMP-00174-A.4, "Fiducial 40x100mm"
J1: library part CMP-47995-000002-1, "CONN PWR JACK 2.1X5.5MM SOLDER", Case/Package=SMD/SMT, Color=Black, Current Rating=5A, Manufacturer=Switchcraft, Package Quantity=120, Supplier Part Number 1=SC2028-1-ND, Category="Power Connectors", ComponentLink1Description=https://datasheet.ciiva.com/17/edg4-17820.pdf?src-supplier=Digi-Key, ComponentLink1URL=https://datasheet.ciiva.com/17/edg4-17820.pdf?src-supplier=Digi-Key, ComponentLink2Description=https://datasheet.ciiva.com/18496/edg4-18496955.pdf?src-supplier=Digi-Key, ComponentLink2URL=https://datasheet.ciiva.com/18496/edg4-18496955.pdf?src-supplier=Digi-Key, ComponentLink3Description=https://datasheet.ciiva.com/18496/edg4-18496956.pdf?src-supplier=Digi-Key, ComponentLink3URL=https://datasheet.ciiva.com/18496/edg4-18496956.pdf?src-supplier=Digi-Key, ComponentLink4Description=https://datasheet.ciiva.com/18496/edg4-18496957.pdf?src-supplier=Digi-Key, ComponentLink4URL=https://datasheet.ciiva.com/18496/edg4-18496957.pdf?src-supplier=Digi-Key, Connector Type=Jack, Contact Material="Copper Alloy", Contact Plating=Tin, Gender=Male, Housing Color=Black, Housing Material=Thermoplastic, Manufacturer Part Number=RASM722PTR13X, Mount="Surface Mount", Pricing 1="1=2.04000, 10=1.95800, 25=1.79520, 50=1.71360 (USD)", RoHS=Yes, Shielding=Unshielded, Stock 1=5317, Supplier 1=Digi-Key, Termination=Solder
J2: library part CMP-0031-00001-1, "Connector; USBMicro-B,Reverse type, SMT; 5 Position; Right Angle", Operating Temperature="-30 to 85 degC", ComponentLink1Description="Manufacturer URL", ComponentLink1URL=http://www.hirose.com/â€Ž, ComponentLink2Description=Datasheet, ComponentLink2URL=http://www.hirose.co.jp/cataloge_hp/e24200011.pdf, DatasheetVersion=08/2010, Mounting Technology="Surface Mount", PackageDescription="5-Pin USB Micro-B R/A Connector", PackageReference=ZX62R-B-5P, PartNumber=ZX62R-B-5P
J4: library part CMP-2000-05628-3, "CONN HEADER VERT 2POS 1.25MM", Ambient Temperature Range High=+85°C, Ambient Temperature Range Low=-40°C, Current Rating=1A, Manufacturer=Molex, Package=0, Temperature="-40°C to +85°C", Voltage Rating=125V, Automotive=No, Category=Conn, ComponentLink2Description=Datasheet, ComponentLink2URL=http://www.molex.com/webdocs/datasheets/pdf/en-us/0530470210_PCB_HEADERS.pdf, Conn Gender=Male, Conn Orientation=Vertical, Contact Material=Tin, Device Class L1=Connectors, Device Class L2="Headers and Wire Housings", Device Class L3=unset, Digikey Description="CONN HEADER VERT 2POS 1.25MM", Footprint Url=https://www.molex.com/pdm_docs/sd/530470210_sd.pdf, Height=4.4mm, Lead Free=Yes, Manufacturer Part Number=53047-0210, Mouser Description="1.25mm Pitch PicoBlade™ Wire-to-Board Header, Vertical, with Friction Lock, 2 Circuits", Number of Contacts=2, Number of Rows=1, Octopart=https://octopart.com/53047-0210-molex-276772, Pitch=1.25mm, RoHS=TRUE, Temperature Range High=+85°C, Temperature Range Low=-40°C
L1: library part CMP-08253-000017-1, "FIX IND 470NH 26.1A 2.97MOHM SMD", Inductance=470nH, Manufacturer=TDK, Package=SPM6550, Rms Current=20.5A, Series Resistance=2.97mΩ, Temperature="-40°C to +125°C", Temperature Range High=+125°C, Temperature Range Low=-40°C, Test Frequency=100kHz, Tolerance=20%, Automotive=Yes, Automotive Grade="Grade 1", Category=Ind, ComponentLink2Description=Datasheet, ComponentLink2URL=https://product.tdk.com/info/en/catalog/datasheets/inductor_automotive_power_spm6550-hz_en.pdf, Composition=Wirewound, Core Material=Metal, Device Class L1="Passive Components", Device Class L2=Inductors, Device Class L3="Fixed Inductors", Digikey Description="FIX IND 470NH 26.1A 2.97MOHM SMD", Height=5mm, Lead Free=Yes, Manufacturer Part Number=SPM6550T-R47M-HZ, Octopart=https://octopart.com/spm6550t-r47m-hz-tdk-90326484, RoHS=TRUE, Saturation Current=20.5A, Shielding=true, Standoff Height=0.15mm
P1: "Connector Header Surface Mount 4 position 0.039 _1.00mm_", Package=None, Availability=Unavailable, MF="JST Sales", MP=BM04B-SRSS-TBT_LF__SN_, Price=None, SnapEDA_Link=https://www.snapeda.com/parts/BM04B-SRSS-TBT%28LF%29%28SN%29/JST%20Sales%20America%20Inc./view-part/1647403/?ref=snap
P2: Color=Natural,White, Contact Resistance=20mR, Current Rating=2A, Flammability Rating="UL94 V-0", Housing Color=Beige, Insulation Resistance=1GR, Manufacturer=JST, Max Operating Temperature=85°C, Max Voltage Rating (AC)=100V, Min Operating Temperature=-25°C, Supplier Part Number 1=455-1736-1-ND, Category=Connectors, ComponentLink1Description=https://datasheet.ciiva.com/8052/1699381-8052048.pdf?src-supplier=Element14, ComponentLink1URL=https://datasheet.ciiva.com/8052/1699381-8052048.pdf?src-supplier=Element14, ComponentLink2Description=https://datasheet.ciiva.com/11747/0900766b80ddea81-11747504.pdf?src-supplier=RSComponents, ComponentLink2URL=https://datasheet.ciiva.com/11747/0900766b80ddea81-11747504.pdf?src-supplier=RSComponents, ComponentLink3Description=https://datasheet.ciiva.com/6747/80567-6747409.pdf?src-supplier=Newark, ComponentLink3URL=https://datasheet.ciiva.com/6747/80567-6747409.pdf?src-supplier=Newark, ComponentLink4Description=https://datasheet.ciiva.com/727/eph-727525.pdf?src-supplier=Digi-Key, ComponentLink4URL=https://datasheet.ciiva.com/727/eph-727525.pdf?src-supplier=Digi-Key, ComponentLink5Description=https://datasheet.ciiva.com/712/eph-712582.pdf?src-supplier=Digi-Key, ComponentLink5URL=https://datasheet.ciiva.com/712/eph-712582.pdf?src-supplier=Digi-Key, ComponentLink6Description=https://datasheet.ciiva.com/712/eph-712583.pdf?src-supplier=Digi-Key, ComponentLink6URL=https://datasheet.ciiva.com/712/eph-712583.pdf?src-supplier=Digi-Key, Connector Type="Male Pin", Contact Material="Copper Alloy,Bronze,Tin,Brass", Contact Mating Length=0.13inch, Contact Plating=Tin,Copper, Depth=5mm, Fastening Type=Detent, Gender=Male, Height=9.4mm, Housing Material=Polyamide, Lead Free="Lead Free", Lead Pitch=2mm, Length=11.95mm, Manufacturer Part Number=B4B-PH-SM4-TB(LF)(SN), Max Current Rating=2A, Mount="Surface Mount", Number of Contacts=4, Number of Poles=4, Number of Positions=4, Number of Rows=1, Orientation=Straight, Packaging="Tape and Reel", Pitch=2mm, REACH SVHC="No SVHC", RoHS=Yes, Supplier 1=Digi-Key, Termination=Solder, Voltage Rating=100V, Voltage Rating (AC)=100V, Width=5.5mm, Working Voltage=100V
P7 P8: library part CMP-2000-05419-1, "Male Header, Pitch 2.54 mm, 1 x 4 Position, Height 10.03 mm, Tail Length 3.56 mm, RoHS, Bulk", Color=White, Current, Rating="5 /  / A", Flammability Rating=UL94V-0, Manufacturer="TE Connectivity", Temperature, Operating="-55to+105 /  / degC", Voltage, Rating="250 /  / V", Agency Approvals=CSA,UL, Angle=Straight, Brand/Series=MTA-100Series, Color, Housing=White, Connector Type=MTA-100, Contact Centerline Spacing="0.100 /  / in.", Contact Mating Area Plating=Tin, Contact Plating=Tin, Contact Shape=Square, Contact Termination Area Plating=Tin, Datasheet URL=https://datasheet.ciiva.com/16286/eng-ds-82056-mta-0608-16286228.pdf, Datasheet Version=Dec-14, Length, Overall="0.4 /  / \"", Length, Pin="0.14 /  / \"", Length, Terminal Post="0.14 /  / in.", Manufacturer URL=http://www.te.com/, Material, Contact=CopperAlloy, Material, Housing=Polyester, Mount Angle=Vertical, Mounting Hole Size="0.04 /  / \"", Mounting Type=PCMount, Number of Contacts=4, Number of Positions=4, Number of Rows=1, Pin Spacing="0.1 /  / \"", Primary Type=InterconnectSystem, Size, Post="0.025 /  / in.", Special Features=Pinstrip, Standards=RoHSCompliant,ELVCompliant,UL94V-0, Termination=Solder, Type=PCBPlug
R1 R2 R11 R12 R13: library part CMP-1012-00331-1, "27R 0.1W 1% 0603 (1608 Metric)  SMD", Case-EIA=0603, Case-Metric=1608, Power="0.1 W", Tolerance="1 %", Technology=SMT
R3 R5 R10: library part CMP-1012-00510-1, "1K 0.1W 1% 0603 (1608 Metric)  SMD", Case-EIA=0603, Case-Metric=1608, Power="0.1 W", Tolerance="1 %", Technology=SMT
R4 R6 R7 R23 R24 R35: library part CMP-1012-00001-1, "Jumper 0603 (1608 Metric)", Case-EIA=0603, Case-Metric=1608, Power=None, Technology=SMT, Tolerance=None
R8 R9 R14 R16 R17 R19 R20 R31 R32 R33 R34 R38: library part CMP-1012-00623-1, "10K 0.1W 1% 0603 (1608 Metric)  SMD", Case-EIA=0603, Case-Metric=1608, Power="0.1 W", Tolerance="1 %", Technology=SMT
R15 R18 R28 R29: library part CMP-1012-00397-1, "100R 0.1W 1% 0603 (1608 Metric)  SMD", Case-EIA=0603, Case-Metric=1608, Power="0.1 W", Tolerance="1 %", Technology=SMT
R25: library part CMP-1011-00810-1, "453K 0.063W 1% 0402 (1005 Metric)  SMD", Case-EIA=0402, Case-Metric=1005, Power="0.063 W", Tolerance="1 %", Technology=SMT
R26 R27: library part CMP-1012-00736-1, "100K 0.1W 1% 0603 (1608 Metric)  SMD", Case-EIA=0603, Case-Metric=1608, Power="0.1 W", Tolerance="1 %", Technology=SMT
R30: library part CMP-2100-03695-1, "Trimming Potentiometer, 10000 Ohm, -40 to 100 degC, 3-Pin SMD, RoHS, Tape and Reel", Case/Package=SMD/SMT, Colour=Silver, Manufacturer=Bourns, Max Operating Temperature=100degC, Max Power Dissipation=100mW, Min Operating Temperature=-40degC, Package Description="3-Pin Surface Mount Device, Body 3.8 x 3.6 mm", Package Quantity=2500, Package Reference=TC33X-2, Resistance=10KOhm, Temperature Coefficient=250ppm/degreesC, Tolerance=25%, Voltage Rating (DC)=50V, Composition=Potentiometer, Contact Plating=Silver, Datasheet URL=http://www.bourns.com/docs/Product-Datasheets/TC33.pdf, Datasheet Version=42583.0, Depth=3.8mm, Height=0.047inch, Lead Free=LeadFree, Length=3mm, Manufacturer URL=http://www.bourns.com/, Military Standard=Not, Mount=SurfaceMount, Number of Turns=1, Packaging=TapeandReel, Power Rating=100mW, Radiation Hardening=No, REACH SVHC=NoSVHC, RoHSCompliant=true, Taper=Linear, Termination=FootPrint, Weight=29.4mg, Width=0.118inch
SD1: library part CMP-2000-05825-1, "Micro SD Card, RA, -25 to 85 degC, 8-Pin SMD, RoHS, Tape and Reel", Current Rating=500mA, Manufacturer=Molex, Package Description="8-Pin Surface Mount Device, Body 11.95 x 11.4 mm, Pitch 1.1 mm", Voltage Rating=10VAC/DC, Brand=Molex, Card Type=microSD, Contact Material=PhosphorBronze, Contact Plating=Gold, Datasheet URL=http://www.molex.com/pdm_docs/sd/1040310811_sd.pdf, Datasheet Version="Rev. E, 04/2006", Height=1.42mm, Housing Material=LiquidCrystalPolymer(LCP), Insertion - Extraction Style=Push-Pull, Length=11.4mm, Manufacturer URL=http://www.molex.com/, Mating Cycles=10000, Mounting Technology=SurfaceMount, Mounting Type=Standard, Number of Contacts=8, Number of Rows=1Row, Orientation=RightAngle, Package Reference=104031-0811, Packaging=Reel, Pitch=1.1mm, Product=CardConnectors, Product Category=MemoryCardConnectors, RoHS=True, Series=104031, Termination Style=SMD
TP1 TP2 TP3 TP4 TP5 TP6 TP7 TP8 TP9 TP10 TP11 TP12 TP13 TP14 TP15 TP16 TP17 TP18 TP19 TP20 TP21 TP23 TP24: library part "0.1\" Pad-A.4"
U1: library part CMP-0248-00027-3, "IC USB SERIAL BASIC UART 12DFN", Case/Package=DFN, Max Operating Temperature=85°C, Max Supply Voltage=5.5V, Min Operating Temperature=-40°C, Min Supply Voltage=2.97V, Operating Supply Current=8mA, Operating Supply Voltage=5V, Package Quantity=5000, Data Rate=3Mbps, Height=0.75mm, Interface=UART, Lead Free="Lead Free", Length=3mm, Mount="Surface Mount", Number of Pins=12, Number of Ports=1, Number of Transceivers=1, Packaging="Tape and Reel", REACH SVHC="No SVHC", Width=3mm
U2: "CONN HEADER 10POS UNSHD VERT T/H", Current Rating="10 A", Manufacturer="Amphenol / FCI", Supplier Part Number 1=609-3712-ND, Voltage Rating="125 V", Brand=FCI, ComponentLink1Description=https://datasheet.ciiva.com/1433/1079612-1433267.pdf, ComponentLink1URL=https://datasheet.ciiva.com/1433/1079612-1433267.pdf, ComponentLink2Description=https://datasheet.ciiva.com/409/20021111-409158.pdf, ComponentLink2URL=https://datasheet.ciiva.com/409/20021111-409158.pdf, ComponentLink3Description=https://datasheet.ciiva.com/5131/20021111-5131386.pdf, ComponentLink3URL=https://datasheet.ciiva.com/5131/20021111-5131386.pdf, ComponentLink4Description=https://datasheet.ciiva.com/9465/20021111-9465402.pdf, ComponentLink4URL=https://datasheet.ciiva.com/9465/20021111-9465402.pdf, Contact Material=Nickel, Contact Plating=Gold, Factory Pack Quantity=93, Housing Material=Plastic, Manufacturer Part Number=20021111-00010T4LF, Mating Post Length="3.05 mm", Mounting Angle=Vertical, Mounting Style="Through Hole", Number of Positions=10, Number of Positions / Contacts=10, Number of Rows=2, Packaging=Tube, Pitch="1.27 mm", Product Category="Headers & Wire Housings", Product Type=Headers, RoHS=Details, Series=Minitek, Stack Height="2.5 mm", Supplier 1=Digi-Key, Termination Post Length="2.3 mm", Termination Style="Through Hole", Type=Unshrouded
U3: "RF TXRX MODULE WIFI TRACE ANT", Current - Receiving=-, Frequency=2.4GHz, Manufacturer=Atmel, Manufacturer Part Number=ATSAMW25H18-MR510PB, Operating Temperature="-40°C ~ 85°C", Package / Case=Module, Power - Output=17dBm, Supplier Part Number 1=ATSAMW25H18-MR510PB-ND, Voltage - Supply="2.7 V ~ 4.2 V", Antenna Type="Integrated, Trace", Category="RF/IF and RFID", ComponentLink1Description=http://www.atmel.com/devices/ATSAMW25.aspx, ComponentLink1URL=http://www.atmel.com/devices/ATSAMW25.aspx, ComponentLink2Description=http://www.farnell.com/datasheets/1965115.pdf, ComponentLink2URL=http://www.farnell.com/datasheets/1965115.pdf, Current - Transmitting=-, Data Rate=65Mbps, Family="RF Transceiver Modules", Memory Size="256kB Flash, 32kB SRAM", Modulation=-, Mounting Type="Surface Mount", Packaging=Tray, Pricing 1="1=19.14 (USD)", Protocol=802.11b/g/n, RF Family/Standard=WiFi, Sensitivity=-95.5dBm, Serial Interfaces="SPI, UART", Series="Xplained Pro", Stock 1=120, Supplier 1=Digikey
U4: "2.4V-5.5V input, 4A step-down converter with 1% Accuracy in 1.5mm x 1.5mm QFN 6-VSON-HR -40 to 125", Manufacturer_Name="Texas Instruments", Mouser Part Number=595-TPS62827DMQR, Arrow Part Number=TPS62827DMQR, Arrow Price/Stock=https://www.arrow.com/en/products/tps62827dmqr/texas-instruments, Datasheet Link=http://www.ti.com/lit/ds/symlink/tps62827.pdf, Height=1mm, Manufacturer_Part_Number=TPS62827DMQR, Mouser Price/Stock=https://www.mouser.co.uk/ProductDetail/Texas-Instruments/TPS62827DMQR?qs=byeeYqUIh0P9BITyOJrN9g%3D%3D
U5: library part CMP-12733-000002-1, "IC AMP CLASS D MONO 2.5W 8MSOP", Manufacturer="Diodes Inc.", Max Junction Temp=+125°C, Max Supply Voltage=5.5V, Min Supply Voltage=2V, Nominal Supply Current=4mA, Package=MSOP-8, Power At Speaker R="2.5W @ 4Ω", Temperature="-40°C to +85°C", Temperature Range High=+85°C, Temperature Range Low=-40°C, Voltage Gain=24dB, Automotive=No, Category=IC, ComponentLink2Description=Datasheet, ComponentLink2URL=https://www.diodes.com/assets/Datasheets/PAM8302A.pdf, Device Class L1="Integrated Circuits (ICs)", Device Class L2="Linear ICs", Device Class L3="Amplifiers - Audio", Digikey Description="IC AMP CLASS D MONO 2.5W 8MSOP", Footprint Url=https://www.diodes.com/assets/Package-Files/MSOP-8.pdf, Height=1.1mm, Ipc Land Pattern Name=SOP65P490X110-8, Lead Free=Yes, Manufacturer Part Number=PAM8302AASCR, Mouser Description="Audio Amplifiers 2.5W MONO FILTERLESS CLASS-D AUDIO AMP", Number Of Channels=1, Octopart=https://octopart.com/pam8302aascr-diodes+inc.-29030473, RoHS=TRUE, Standoff Height=0.05mm
U6: "JOYSTICK 10K OHM 2 AXIS TH", Manufacturer="Adafruit Industries", Manufacturer Part Number=2765, Resistance=10kR, Supplier Part Number 1=1528-1730-ND, ComponentLink1Description=https://media.digikey.com/pdf/Data%20Sheets/Adafruit%20PDFs/2765_Web.pdf?src-supplier=Digi-Key, ComponentLink1URL=https://media.digikey.com/pdf/Data%20Sheets/Adafruit%20PDFs/2765_Web.pdf?src-supplier=Digi-Key, Height=0.472inch, Length=0.707inch, Mount="Through Hole", Packaging=Bulk, Pricing 1="1=2.50000 (USD)", RoHS=Yes, Stock 1=17, Supplier 1=Digi-Key, Width=0.697inch
U7: library part CMP-144040-000003-1, "SENSOR HUMI/TEMP I2C 2% SMD", Manufacturer=Sensirion, Max Supply Voltage=3.6V, Min Supply Voltage=1.62V, Operating Supply Current=0.3-900uA, Package=0, Temperature="-40°C to +125°C", Temperature Range High=+125°C, Temperature Range Low=-40°C, Accuracy=2%, Automotive=No, Category=IC, ComponentLink2Description=Datasheet, ComponentLink2URL=https://www.sensirion.com/fileadmin/user_upload/customers/sensirion/Dokumente/0_Datasheets/Humidity/Sensirion_Humidity_Sensors_SHTC3_Datasheet.pdf, Device Class L1=Sensors, Device Class L2="Temperature and Humidity Sensors", Device Class L3=unset, Digikey Description="SENSOR HUMI/TEMP I2C 2% SMD", Height=0.75mm, Interface=I2C, Ipc Land Pattern Name=DFN200X200X75-4, Lead Free=Yes, Manufacturer Part Number=SHTC3, Mouser Description="SHTC3 Series 0 to 100% RH 3.6 V Humidity and Temperature Sensor IC - DFN-4", Octopart=https://octopart.com/shtc3-sensirion-91912225, Resolution=16bits, RoHS=TRUE, Sensor Output=I2C
X1: library part CMP-0447-00001-2, "Crystal, 32.768 kHz, 12.5 pF, -40 to 85 degC, SMD Low Profile 3.2 x 1.5 x 0.9 mm, Tape and Reel", Equivalent Series Resistance (R1)="70 Kohm", Frequency="32.768 kHz", Frequency Tolerance @+25degC="+/- 20 ppm", Insulation Resistance (Min)="500 Mohm", Load Capacitance (CL)="12.5 pF", Manufacturer=Abracon, Operating Temperature="-40 to 85 degC", Q Value (Type)=30000, Shunt Capacitance (C0)="0.9 to 1.2 pF", ComponentLink1Description="Manufacturer URL", ComponentLink1URL=http://www.abracon.com/, ComponentLink2Description=Datasheet, ComponentLink2URL=http://www.abracon.com/Resonators/ABS07.pdf, ComponentLink3Description="Package Specification", ComponentLink3URL=http://www.abracon.com/Resonators/ABS07.pdf, DatasheetVersion=04.03.13, Drive Level (Type)="0.1 uW", Mounting Technology="Surface Mount", Operation Mode="Flexural Mode (Tuning Fork)", PackageDescription="2-Pin Hand Drawn, Body 3.2x1.5mm, Pitch 2.5mm", PackageReference=ABS07-2, Packing="Tape and Reel", PartNumber=ABS07-32.768KHz-T

## Free pads (board coordinates)
  round 141.73 hole 106.3 paste-102.36: HH1(92.52,2269.69) HH2(3057.09,2269.69) HH3(92.52,92.52) HH4(3057.09,92.52)

## Via types
v1: diameter 20, hole 8, Top Layer to Bottom Layer, 76 vias
v2: diameter 20, hole 12, Top Layer to Bottom Layer, 9 vias
v3: diameter 20, hole 8, Top Layer to Bottom Layer, tented both sides, 1 vias

## Nets (pads, with @x,y where several pads share a name; then routed paths per layer and width w, separated by ;. In a path a pad name is that pad's centre, name@x,y a point inside that pad or via, vN(x,y) a via of type N, cw(c..) or ccw(c..) an arc to the next point about the centre after c; other vN are vias at no path point)
3V3: C9.2 C10.2 C14.2 C23.2 P1.2 P2.2 P7.2 P8.2 R7.2 R8.2 R9.2 R10.1 R17.2 R19.2 R20.2 R35.1 SD1.4 TP5.1 TP11.1 TP16.1 U2.1 U3.7 U3.21 U6.3 U6.6 | length 996
  Top Layer w8: P1.2 v1(1062.99,1893.7) ; R35.1 v1(1314.96,1724.41) R9.2
  Top Layer w10: R10.1 v1(535.43,370.08) ; U3.7 v1(604.11,764.21) ; TP5.1 862.2,1692.91 C23.2 v1(893.7,1755.91) R8.2 ; SD1.4 v1(906.48,144.7) ; R19.2 v1(1366.14,200.79) 1366.14,244.09 R20.2 TP16.1 ; v1(1858.27,1338.58) R7.2 ; C14.2 v1(2370.08,122.05) 2413.17,122.05 TP11.1 R17.2
  Top Layer w20: U3.21 v1(1322.99,747.87) 1366.3,747.87 C9.2 ; C10.2 U2.1@2060.24,200.79
5V: C20.2 J1.2 R6.1 U5.6 | length 113.7
  Top Layer w10: U5.6 1623.03,2034.45 v1(1633.86,2023.62) ; R6.1 C20.2@1775.59,2110.24
  other v1: 2858.27,2011.81 2858.27,2051.18 1775.59,2078.74 2858.27,2094.49 2858.27,2133.86 2854.33,2165.35
ADC_IN_VREFP: TP23.1 U3.34 | length 108.7
  Top Layer w10: TP23.1 1123.8,1348.64 U3.34
"Audio +_6": C22.2 J4.2 U5.5 | length 217.3
  Top Layer w10: J4.2 1634.84,2121.42 1648.62,2107.64 U5.5
"Audio -_6": C18.2 J4.1 U5.8 | length 217.3
  Top Layer w10: U5.8 1571.85,2107.28 1585.63,2121.06 J4.1
"Audio V_S\D\_1": R38.2 U3.36 U5.1 | length 1104.3
  Top Layer w10: U3.36 1029.31,1525.37 1114.17,1610.24 1344.27,1610.24 1381.89,1647.85 1381.89,1858.27 1437.99,1914.37 U5.1
CBUS0_4: D1.2 U1.6 | length 203.8
  Top Layer w10: U1.6 381.28,1689.59 405.51,1665.35 451.39,1665.35 D1.2
DAC_OUT_VREFP: TP24.1 U3.33 | length 126.1
  Top Layer w10: U3.33 1171.04,1293.09 TP24.1
"DEBUG INPUT_3": R16.1 U3.22 | length 394.4
  Top Layer w10: U3.22 1480.47,795.12 1547.24,728.35 R16.1
FLASH_MEM_SPI_SS: R19.1 SD1.2 TP21.1 U3.37 | length 1787.7
  Top Layer w10: v1(811.02,866.14) 811.02,1102.36 858.27,1149.61 952.76,1149.61 982.07,1178.92 U3.37 ; SD1.2 993.09,91.52 996.06,94.49 ; v1(996.06,200.79) 996.06,94.49 ; R19.1 1311.02,149.61 1311.02,118.11 TP21.1 ; R19.1@1307.09,141.73 1043.31,141.73 996.06,94.49
  Bottom Layer w10: v1(811.02,866.14) 996.06,681.1 v1(996.06,200.79)
GND: B1.3 B1.4 B2.3 B2.4 C1.1 C2.1 C3.1 C4.1 C5.1 C6.1 C7.1 C8.1 C9.1 C10.1 C11.1 C12.1 C13.1 C14.1 C16.1 C17.1 C18.1 C19.2 C20.1 C22.1 C23.1 D2.1 J1.1 J1.3 J2.5 J2.6 J2.7 J2.8 J2.9 J2.10 J2.11 P1.1 P1.SH1 P1.SH2 P2.1 P7.1 P8.1 R14.1 R27.1 R30.3 R32.1 R34.1 R38.1 SD1.6 SD1.10 SD1.11 SD1.12 TP3.1 TP12.1 U1.5 U1.13 U2.3 U2.5 U2.9 U3.0 U3.1 U3.10 U3.17 U3.20 U3.32 U3.42 U3.51 U4.4 U5.7 U6.1 U6.4 U7.4 | length 3782.8
  Top Layer w8: J2.5 548.83,2184.69 J2.6
  Top Layer w10: U1.5 383.62,1755.29 399.8,1755.29 424.04,1779.53 U1.13@437.01,1766.56 ; U3.0@453.25,945.22 453.25,1031.13 540.57,1031.13 U3.0@540.57,945.22 ; D2.1 499.44,2027 v1(500,2027.56) ; C6.1 539.37,1893.7 v1(539.37,1866.14) ; v1(767.72,1755.91) C23.1 ; v1(1480.32,2169.29) C18.1 ; C22.1 v1(1732.28,2169.29) ; C20.1 v1(1834.65,2153.54) ; C20.1@1850.39,2129.92 C16.1
  Top Layer w15: v1(153.54,1673.23) C1.1 ; P1.SH1 v1(1007.87,1906.5) 1023.62,1890.75 P1.1 ; v1(1035.43,1696.85) U7.4 ; P1.SH2 v1(1239.17,1941.93) ; R38.1 v1(1460.63,2011.81) ; v1(1597.44,2010.83) U5.7